# EAGLE board Ocreeb MK 2 _combo half _pcb (EAGLE 9.7.0)
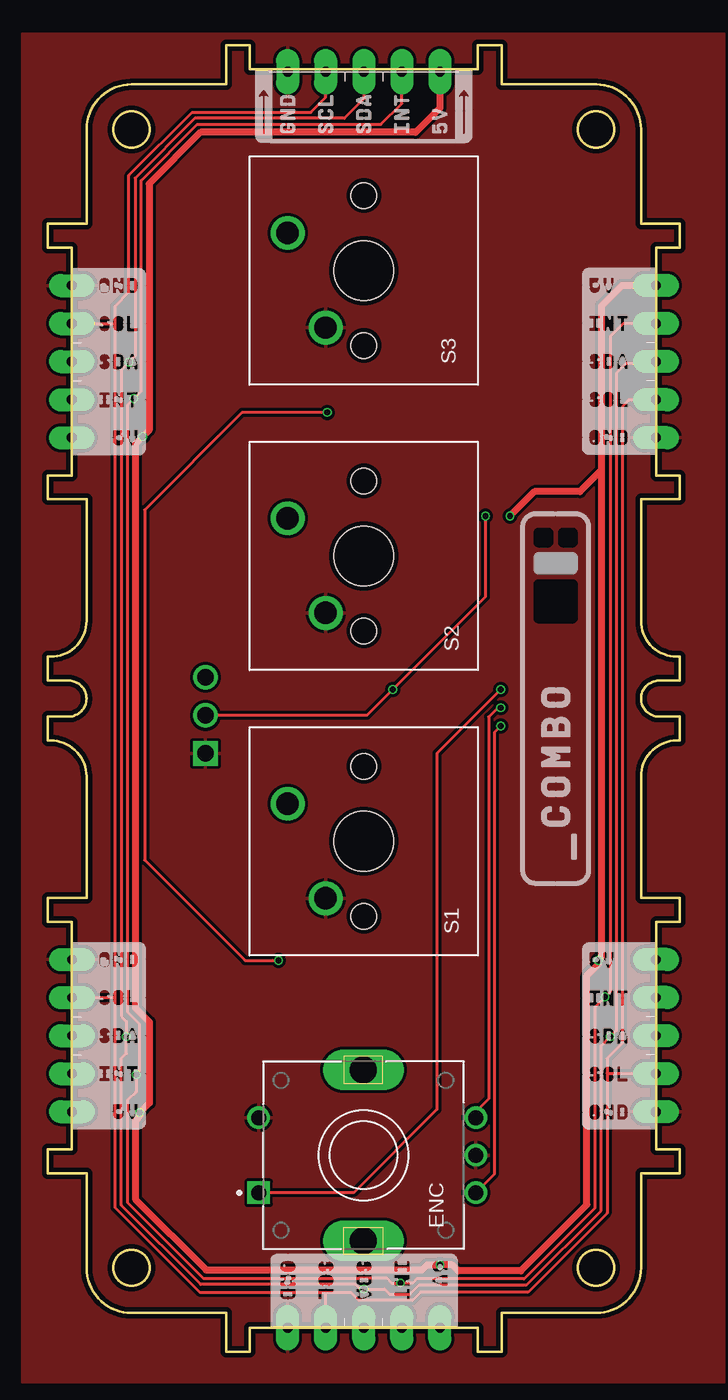
[diagram p0: board, top side]
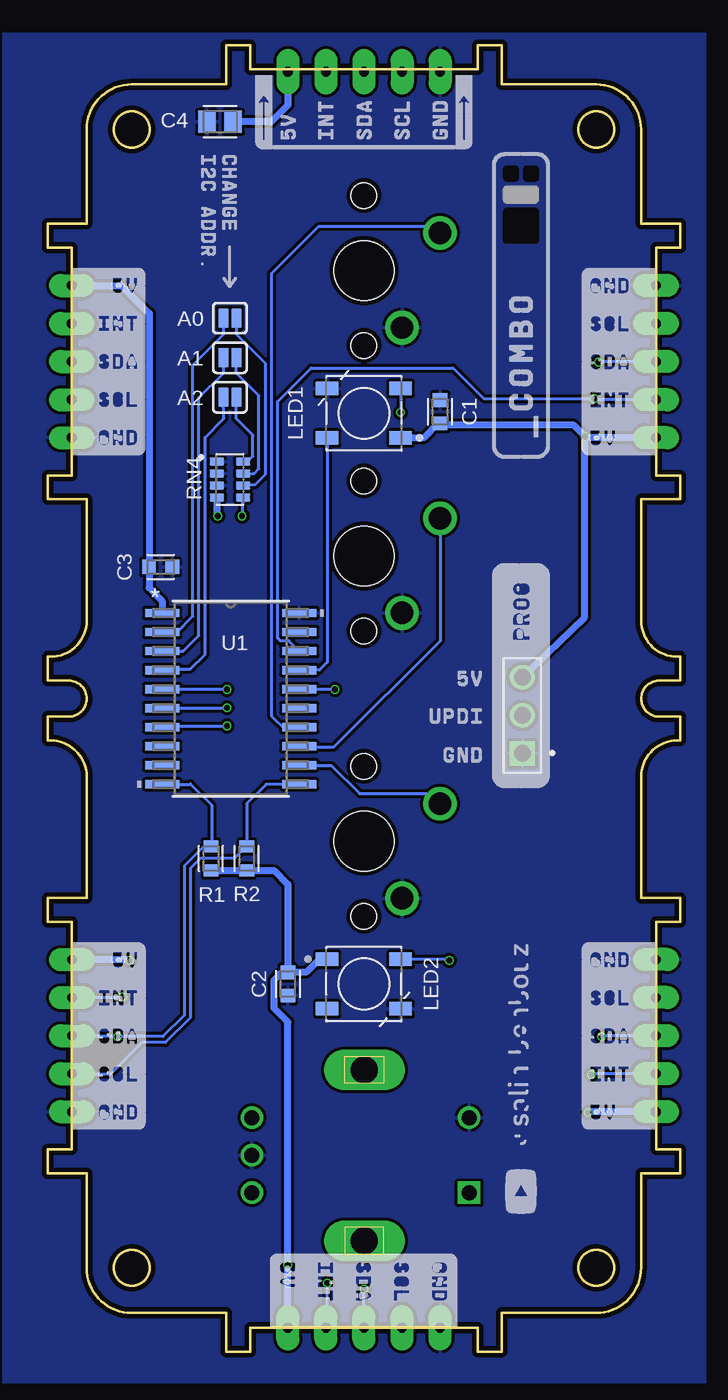
[diagram p1: board, bottom side, seen from below]

Size 42.2 x 87.2 mm. Coordinates in mm from the lower left corner, seen from the top.
Outline: 13.51,85.6 13.51,87.2 11.91,87.2 11.91,84.6 5.6,84.6 arc90 2.6,81.6 2.6,75.3 0,75.3 0,73.69 1.6,73.69 1.6,58.51 0,58.51 0,56.91 2.6,56.91 2.6,48.8 arc-90 0.2,46.4 0,46.4 0,44.8 1.4,44.8 arc-180 1.4,42.4 0,42.4 0,40.8 0.2,40.8 arc-90 2.6,38.4 2.6,30.3 0,30.3 0,28.7 1.6,28.7 1.6,13.51 0,13.51 0,11.91 2.6,11.91 2.6,5.6 arc90 5.6,2.6 11.91,2.6 11.91,0 13.51,0 13.51,1.6 28.7,1.6 28.7,0 30.3,0 30.3,2.6 36.6,2.6 arc90 39.6,5.6 39.6,11.91 42.2,11.91 42.2,13.51 40.6,13.51 40.6,28.7 42.2,28.7 42.2,30.3 39.6,30.3 39.6,38.4 arc-90 42,40.8 42.2,40.8 42.2,42.4 40.8,42.4 arc-180 40.8,44.8 42.2,44.8 42.2,46.4 42,46.4 arc-90 39.6,48.8 39.6,56.91 42.2,56.91 42.2,58.51 40.6,58.51 40.6,73.69 42.2,73.69 42.2,75.3 39.6,75.3 39.6,81.6 arc90 36.6,84.6 30.3,84.6 30.3,87.2 28.7,87.2 28.7,85.6 13.51,85.6
Outline: circle at 5.6,5.6 radius 1.2
Outline: circle at 36.6,5.6 radius 1.2
Outline: circle at 36.6,81.6 radius 1.2
Outline: circle at 5.6,81.6 radius 1.2
Copper layers (1*16): Top 0.035mm / dielectric 1.5mm / Bottom 0.035mm
Design rules "PCBWay_2L_152um-Track": minimum track width 6mil, minimum drill 0.3mm, track to track 6mil, track to pad 6mil, pad to pad 6mil, via to via 6mil, smd to smd 0mil, copper to edge 0.3mm, drill to drill 10mil, minimum pad ring 6mil, minimum via ring 0.1mm, stop-mask expansion 2mil, vias tented up to drill 0.45mm, thermal gap 0.2mm
Net classes: 0 default: width 0.203 mm, drill 0.381 mm, clearance 0.203 mm; 1 power: width 0.457 mm, drill 0.381 mm, clearance 0.203 mm
tRestrict: area 32.5,48.7 to 35.3,51.5; area 32.5,53.8 to 33.7,54.9; area 34.1,53.8 to 35.3,54.9; area 32.5,52 to 35.3,53.3
bRestrict: area 9.5,74 to 11.8,76.3; area 9.5,76.7 to 11.8,77.8; area 10.8,78.2 to 11.8,79.1; area 9.5,78.2 to 10.4,79.1

## Footprints (pad centres in the part's own frame; a part is rotated, then mirrored left to right if it is on the bottom)
SMT-JUMPER_2_NC_PASTE_SILK = smd 0.635 x 1.27: 1 -0.432,0; 2 0.432,0
CAPC1608X85 = smd 0.921 x 0.97: 1 -0.775,0; 2 0.775,0
CAPC2012X110 = smd 1.165 x 1.465: 1 -0.875,0; 2 0.875,0
PEC11R-4215F-S0024 = drill 1 square: 1 -2.5,7 | drill 1: 2 2.5,7; A -2.5,-7.5; B 2.5,-7.5; C 0,-7.5 | drill 1.8 long: P1 -5.7,0; P2 5.7,0
WS2812B = smd 1.5 x 0.9: 1 -2.45,1.65; 2 -2.45,-1.65; 3 2.45,-1.65; 4 2.45,1.65
61300311121 = drill 1.1 square: 1 -2.54,0 | drill 1.1: 2 0,0; 3 2.54,0
RESC1608X60 = smd 0.799 x 0.974: 1 -0.815,0; 2 0.815,0
RESCAF80P320X160X60-8N = smd 0.97 x 0.53: 1 -0.875,1.2; 2 -0.875,0.4; 3 -0.875,-0.4; 4 -0.875,-1.2; 5 0.875,-1.2; 6 0.875,-0.4; 7 0.875,0.4; 8 0.875,1.2
CHERRY_MX1A-11NN_SWITCH_NO_HOTSWAP = drill 1.5: 1_ALT -3.81,2.54; 2_ALT 2.51,5.08 | hole 3.988: 0,0 | hole 1.7: 5,0; -5,0
SOIC20-W_MC_MCH-M = smd 2.286 x 0.559: 1 -4.572,5.715; 2 -4.572,4.445; 3 -4.572,3.175; 4 -4.572,1.905; 5 -4.572,0.635; 6 -4.572,-0.635; 7 -4.572,-1.905; 8 -4.572,-3.175; 9 -4.572,-4.445; 10 -4.572,-5.715; 11 4.572,-5.715; 12 4.572,-4.445; 13 4.572,-3.175; 14 4.572,-1.905; 15 4.572,-0.635; 16 4.572,0.635; 17 4.572,1.905; 18 4.572,3.175; 19 4.572,4.445; 20 4.572,5.715
5_POGO_EDGE = drill 0.65 pad 1.524 long: 1 -5.08,0; 2 -2.54,0; 3 0,0; 4 2.54,0; 5 5.08,0

## Placement (x,y rotation side)
A0  JUMPER-SMT_2_NC_PASTE_SILK  [SMT-JUMPER_2_NC_PASTE_SILK]  30.04,69 180 bottom
A1  JUMPER-SMT_2_NC_PASTE_SILK  [SMT-JUMPER_2_NC_PASTE_SILK]  30.04,66.36 180 bottom
A2  JUMPER-SMT_2_NC_PASTE_SILK  [SMT-JUMPER_2_NC_PASTE_SILK]  30.04,63.72 180 bottom
C1  0.1uF  [CAPC1608X85]  16.02,62.75 270 bottom
C2  0.1uF  [CAPC1608X85]  26.18,24.55 90 bottom
C3  0.1uF  [CAPC1608X85]  34.66,52.39 180 bottom
C4  10uF  [CAPC2012X110]  30.7,82.11 0 bottom
ENC  PEC11R-4215F-S0024  [PEC11R-4215F-S0024]  21.07,13.12 90 top
LED1  WS2812B  [WS2812B]  21.1,62.65 180 bottom
LED2  WS2812B  [WS2812B]  21.1,24.55 0 bottom
PROG  61300311121  [61300311121]  10.53,42.48 90 bottom
R1  10K  [RESC1608X60]  31.31,32.93 270 bottom
R2  10K  [RESC1608X60]  28.92,32.93 270 bottom
RN4  CAY16-103J4LF  [RESCAF80P320X160X60-8N]  30.04,58.23 0 bottom
S1  MX1A-11NNCHERRY_MX_SOLDER  [CHERRY_MX1A-11NN_SWITCH_NO_HOTSWAP]  21.1,34.08 90 top
S2  MX1A-11NNCHERRY_MX_SOLDER  [CHERRY_MX1A-11NN_SWITCH_NO_HOTSWAP]  21.1,53.12 90 top
S3  MX1A-11NNCHERRY_MX_SOLDER  [CHERRY_MX1A-11NN_SWITCH_NO_HOTSWAP]  21.1,72.17 90 top
U1  ATTINY816-SNRSOIC20-W_MC_MCH-M  [SOIC20-W_MC_MCH-M]  29.99,43.6 0 bottom
U$1  5PIN_EDGE5_POGO_EDGE_OUT_  [5_POGO_EDGE]  21.1,85.45 0 top
U$2  5PIN_EDGE  [5_POGO_EDGE]  1.61,66.1 90 top
U$3  5PIN_EDGE  [5_POGO_EDGE]  40.6,66.1 270 top
U$4  5PIN_EDGE  [5_POGO_EDGE]  21.1,1.6 180 top
U$5  5PIN_EDGE  [5_POGO_EDGE]  40.59,21.1 270 top
U$6  5PIN_EDGE  [5_POGO_EDGE]  1.62,21.1 90 top

## Library data of the parts
A0 A1 A2 = SparkFun-Jumpers
C1-C4 = Capacitor; CATEGORY: Capacitor
ENC = Switch; CREATED_BY: PCBLayout.com; DIGIKEY_PART_NUMBER: PEC11R-4215F-S0024-ND; MANUFACTURER: Bourns Inc.; MPN: PEC11R-4215F-S0024
LED1 LED2 = WS2812B; CATEGORY: LED; COLOR: RGB; DESCRIPTION: LED integrated light source; MANUFACTURER: Worldsemi; MPN: WS2812B; OPERATING_TEMP: -25 ℃ to +80℃(TJ); PART_STATUS: Active; SUB_CATEGORY: RGB
PROG = Headers; CREATED_BY: PCBLayout.com; DIGI_KEY_PART_NUMBER: 732-5316-ND; MANUFACTURER: Wurth Electronics Inc.; MPN: 61300311121
R1 R2 = Resistor; CATEGORY: Resistor; SUB-CATEGORY: Fixed
RN4 = CAY16-103J4LF; CHECK_PRICES: https://www.snapeda.com/parts/CAY16-103J4LF/Bourns+-+J.W.+Miller/view-part/?ref=eda; DESCRIPTION: Resistor, Chip Array,10 Kilohms,62 mW,+ 5%,50 V (Max.) | Bourns CAY16-103J4LF; DIGIKEY_PART_NUMBER: CAY16-103J4LFTR-ND; MF: Bourns; MP: CAY16-103J4LF; PACKAGE: 1206 Bourns; PURCHASE-URL: https://www.snapeda.com/api/url_track_click_mouser/?unipart_id=47136&manufacturer=Bourns&part_name=CAY16-103J4LF&search_term=None; SNAPEDA_LINK: https://www.snapeda.com/parts/CAY16-103J4LF/Bourns+-+J.W.+Miller/view-part/?ref=snap
S1-S3 = MX Switch
U1 = Attiny816; COPYRIGHT: Copyright (C) 2023 Ultra Librarian. All rights reserved.; DIGI-KEY_PART_NUMBER_1: ATTINY816-SNRCT-ND; DIGI-KEY_PART_NUMBER_2: ATTINY816-SNRDKR-ND; DIGI-KEY_PART_NUMBER_3: ATTINY816-SNRTR-ND; MANUFACTURER_PART_NUMBER: ATTINY816-SNR; MFR_NAME: Microchip
U$1-U$6 = OCREEB_POGO_CON

## Nets
5V [power]: C1.2 C2.2 C3.2 C4.2 LED1.1 LED2.1 PROG.3 R1.2 R2.2 RN4.4 U1.1 U$1.5 U$2.1 U$3.1 U$4.1 U$5.1 U$6.1
ADDR0: A0.1 RN4.6
ADDR1: A1.1 RN4.7
ADDR2: A2.1 RN4.8
ENC_A: ENC.A U1.7
ENC_B: ENC.B U1.6
ENC_SW: ENC.1 U1.5
GND [power]: C1.1 C2.1 C3.1 C4.1 ENC.2 ENC.C LED1.3 LED2.3 PROG.1 RN4.1 RN4.2 RN4.3 S1.1_ALT S2.1_ALT S3.1_ALT U1.20 U$1.1 U$2.5 U$3.5 U$4.5 U$5.5 U$6.5
INTR: U1.18 U$1.4 U$2.2 U$3.2 U$4.2 U$5.2 U$6.2
N$1: LED1.2 LED2.4
N$2: A0.2 U1.2
N$3: A1.2 U1.3
N$4: A2.2 U1.4
PIXEL: LED1.4 U1.17
SCL: R2.1 U1.11 U$1.2 U$2.4 U$3.4 U$4.4 U$5.4 U$6.4
SDA: R1.1 U1.10 U$1.3 U$2.3 U$3.3 U$4.3 U$5.3 U$6.3
SW1: S1.2_ALT U1.12
SW2: S2.2_ALT U1.13
SW3: S3.2_ALT U1.14
UPDI: PROG.2 RN4.5 U1.16

## Tracks (layer width: path | path; a pad name or v marks a point on that pad's centre or on a via)
5V  (via drill 0.38)
  Top 0.457: U$1.5 26.18,83.02 24.55,81.4 10.2,81.4 6.77,77.97 6.77,61.52 v6.35,61.09 5.87,60.62 5.87,22.93 6.79,22.01 6.79,16.61 v6.14,15.96 6.14,15.71 5.86,15.43 5.86,10.18 10.58,5.46 24.99,5.46 25.33,5.8 v26.18,5.8 26.99,5.8 27.4,5.4 31.58,5.4 35.99,9.81 35.99,25.11 36.75,25.86 v36.75,26.12 36.95,26.33 36.95,58.84 | 36.95,58.84 36.95,69.81 38.32,71.18 U$3.1 | v30.85,55.79 32.48,57.42 35.53,57.42 36.95,58.84
  Bottom 0.457: U$4.1 v26.18,5.8 26.18,22.02 27.1,22.93 27.1,24.82 26.64,25.28 26.23,25.28 C2.2 | U$5.1 36.8,26.18 v36.75,26.12 | U1.1 34.56,50.13 35.44,51 C3.2 35.43,52.39 35.43,69.31 37.3,71.18 U$3.1 | PROG.3 6.38,49.02 6.38,60.82 6.35,60.86 v6.35,61.09 | LED1.1 17.11,61 16.13,61.98 C1.2 15.93,61.89 7.14,61.89 v6.35,61.09 | LED2.1 24.09,26.2 24.96,25.33 C2.2 | R1.2 R2.2 27.09,32.12 26.18,31.21 C2.2 | RN4.4 30.92,55.85 v30.85,55.79 | U$1.5 26.18,83.22 27.3,82.11 C4.2 | U$2.1 6.27,61.02 v6.35,61.09 | U$6.1 6.08,16.02 v6.14,15.96
ADDR0
  Bottom 0.203: RN4.6 28.96,57.83 28.94,57.86 28.39,57.86 27.68,58.57 27.68,65.99 29.63,67.94 A0.1
ADDR1
  Bottom 0.203: A1.1 29.63,65.34 28.11,63.82 28.11,58.94 28.42,58.63 RN4.7
ADDR2
  Bottom 0.203: RN4.8 28.86,59.43 28.52,59.78 28.52,61.18 29.63,62.29 A2.1
ENC_A  (via drill 0.38)
  Top 0.203: v30.24,41.77 29.84,41.37 29.84,11.88 ENC.A
  Bottom 0.203: U1.7 34.31,41.7 34.23,41.77 v30.24,41.77
ENC_B  (via drill 0.38)
  Top 0.203: v30.24,42.99 30.04,42.99 29.43,42.38 29.43,16.88 28.58,16.03 ENC.B
  Bottom 0.203: U1.6 34.54,42.99 v30.24,42.99
ENC_SW  (via drill 0.38)
  Top 0.203: v30.24,44.21 25.98,39.94 25.98,16.17 20.43,10.62 ENC.1
  Bottom 0.203: U1.5 30.27,44.23 v30.24,44.21
GND
  pour Top: -1.68,-2.04 45.15,-2.04 45.15,87.97 -1.68,87.97
  pour Bottom: -1.68,-2.04 45.15,-2.04 45.15,87.97 -1.68,87.97
INTR  (via drill 0.38)
  Top 0.203: U$1.4 23.64,83.33 22.24,81.93 9.98,81.93 6.24,78.19 6.24,64.12 v5.75,63.63 5.33,63.21 5.33,22.68 6.11,21.89 6.11,18.71 v5.91,18.51 5.91,17.36 5.33,16.78 5.33,9.96 10.38,4.91 20.77,4.91 20.79,4.93 22.63,4.93 22.97,4.58 v23.55,4.58 24.36,4.58 24.64,4.87 31.8,4.87 36.53,9.59 36.53,23 37.22,23.69 | 37.22,23.69 v37.2,23.69 | 37.22,23.69 37.54,24.01 37.54,67.76 38.42,68.64 U$3.2
  Bottom 0.203: U$5.2 37.18,23.64 37.2,23.66 v37.2,23.69 | U$4.2 23.54,1.7 23.54,4.79 23.55,4.78 v23.55,4.58 | U1.18 26.1,47.46 26.69,47.46 26.87,47.64 26.87,63.43 24.63,65.66 15.16,65.66 13.12,63.63 v5.75,63.63 5.68,63.56 U$2.2 | U$6.2 5.86,18.56 v5.91,18.51
N$1  (via drill 0.38)
  Top 0.203: v18.66,62.7 12.97,62.7 6.47,56.2 6.47,32.83 13.18,26.12 v15.41,26.12
  Bottom 0.203: LED1.2 18.65,62.71 v18.66,62.7 | v15.41,26.12 15.49,26.2 LED2.4
N$2
  Bottom 0.203: U1.2 33.57,48.05 32.52,49.1 32.52,65.87 30.45,67.94 A0.2
N$3
  Bottom 0.203: U1.3 33.17,46.77 32.11,47.83 32.11,63.68 30.45,65.34 A1.2
N$4
  Bottom 0.203: U1.4 34.49,45.58 32.68,45.58 31.71,46.56 31.71,61.04 30.45,62.29 A2.2
PIXEL
  Bottom 0.203: LED1.4 23.55,60.8 23.54,60.49 23.54,46.04 24.07,45.51 U1.17
SCL
  Top 0.203: U$1.2 18.56,83.73 17.57,82.74 9.65,82.74 5.43,78.53 5.43,70.73 4.51,69.81 4.51,68.59 | 4.51,23.69 4.51,9.62 10.19,3.95 18.56,3.95 | 4.51,23.69 4.51,68.59 | 37.34,18.61 37.34,19.58 38.36,20.6 38.36,63.09 38.78,63.51 40.55,63.51 U$3.4 | 37.34,18.61 37.34,9.26 32.06,3.98 24.9,3.98 24.35,3.43 20.77,3.43 20.25,3.95 18.56,3.95 | U$4.4 18.56,3.95 | U$5.4 37.39,18.56 37.34,18.61 | U$2.4 4.47,68.64 4.51,68.59 | U$6.4 4.47,23.64 4.51,23.69
  Bottom 0.203: U1.11 27.63,37.89 28.92,36.59 R2.1 29.74,32.93 32.02,32.93 32.68,32.27 32.68,22.3 34.34,20.64 35.93,20.64 38.01,18.56 U$5.4
SDA  (via drill 0.38)
  Top 0.203: U$1.3 21.1,83.63 19.8,82.34 9.81,82.34 5.84,78.36 5.84,66.46 v5.44,66.07 4.92,65.55 4.92,22.39 5.25,22.06 v5.25,21.05 5.25,19.92 4.92,19.59 4.92,9.79 10.21,4.5 20.53,4.5 20.85,4.18 v21.1,4.18 22.49,4.18 22.83,3.84 24.18,3.84 24.81,4.46 31.97,4.46 36.93,9.42 36.93,20.44 v37.54,21.05 37.95,21.45 37.95,65.33 38.58,65.95 40.45,65.95 U$3.3
  Bottom 0.203: U$5.3 37.6,21.1 v37.54,21.05 34.51,21.05 33.09,22.47 33.09,32.43 31.78,33.75 R1.1 31.26,33.8 31.26,36.49 32.68,37.91 32.71,37.89 U1.10 | U$4.3 v21.1,4.18 | U$2.3 5.41,66.1 v5.44,66.07 | U$6.3 5.2,21.1 v5.25,21.05
SW1
  Bottom 0.203: U1.12 25.39,39.13 23.27,39.13 21.4,37.26 16.49,37.26 S1.2_ALT
SW2
  Bottom 0.203: S2.2_ALT 16.02,47.46 23.13,40.35 25.34,40.35 U1.13
SW3
  Bottom 0.203: S3.2_ALT 16.43,75.09 24.15,75.09 27.27,71.97 27.27,42.46 26.38,41.57 25.55,41.57 U1.14
UPDI  (via drill 0.38)
  Top 0.203: PROG.2 21.3,42.48 v23.03,44.21 29.23,50.41 v29.23,55.79
  Bottom 0.203: U1.16 23.06,44.23 v23.03,44.21 | RN4.5 29.23,56.97 v29.23,55.79